# Altium PCB EE-10_Breakout.PcbDoc
Units mm, origin at the board's own origin, x right, y up, seen from the top; angles counter-clockwise.
Board outline 100.96 x 21.72 mm, 4 copper layers (L1 (Top), L2 (Gnd), L3 (VDD_NRF), L4 (Bottom)), stack 0.778 mm thick; 14 components, 41 nets, 171 pads, 65 vias.
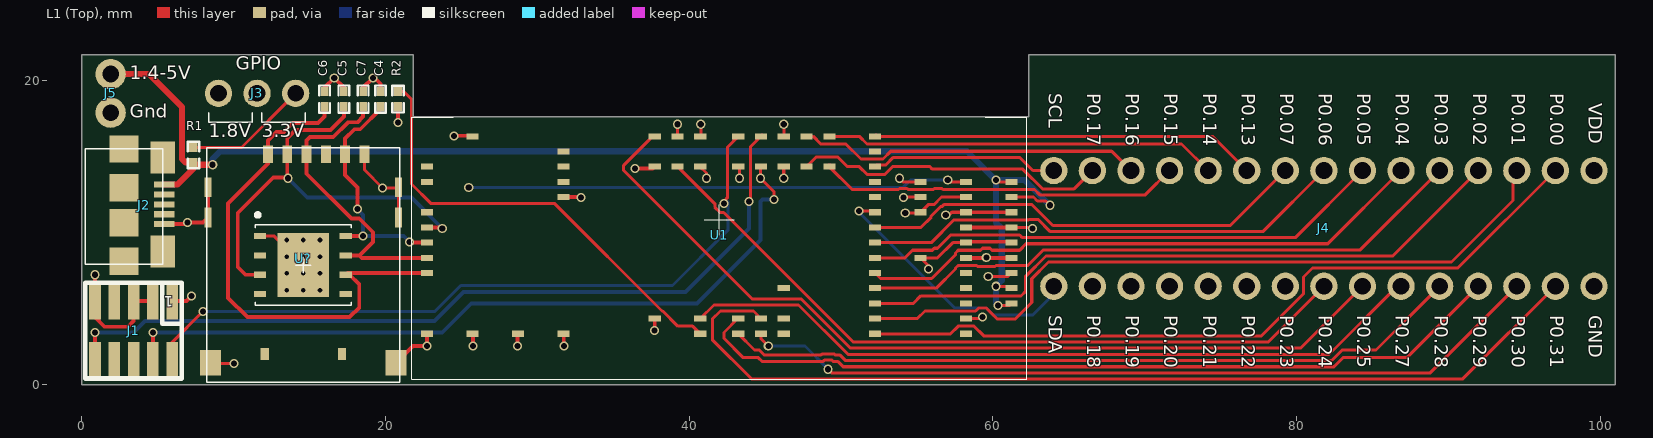
[diagram p0: L1 (Top) view]
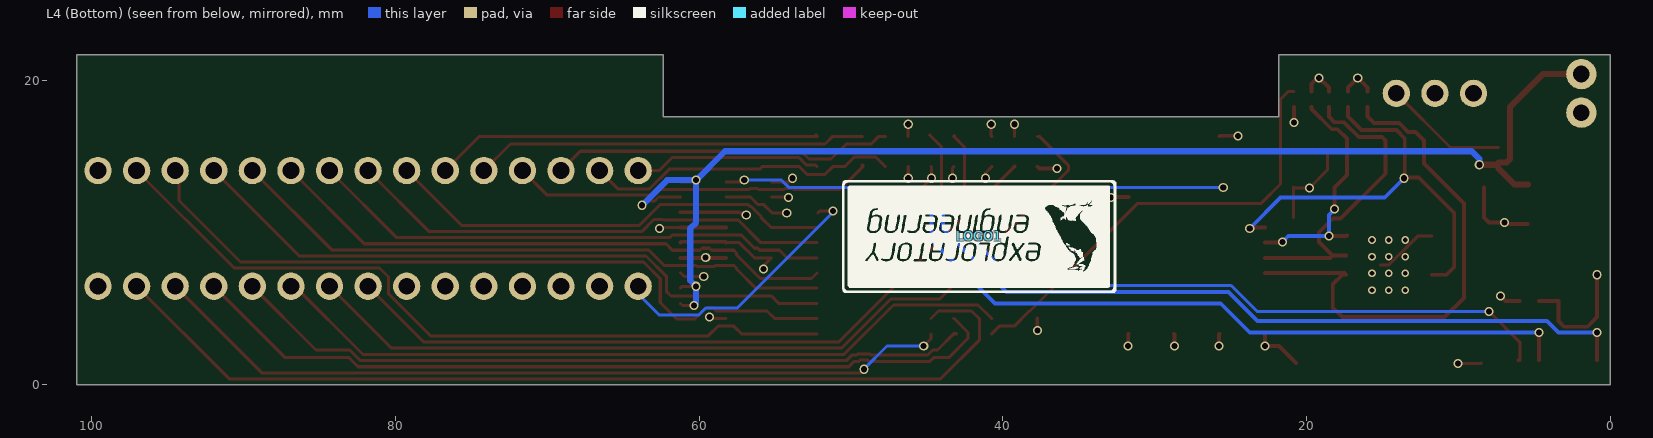
[diagram p1: L4 (Bottom) view, seen from below]
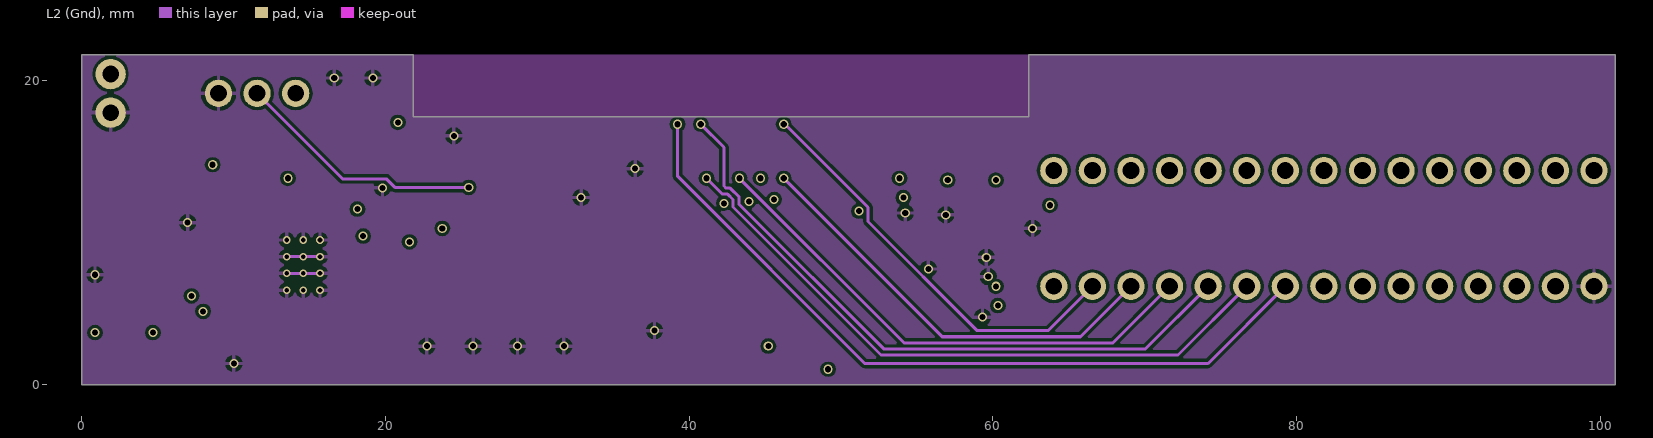
[diagram p2: L2 (Gnd)]
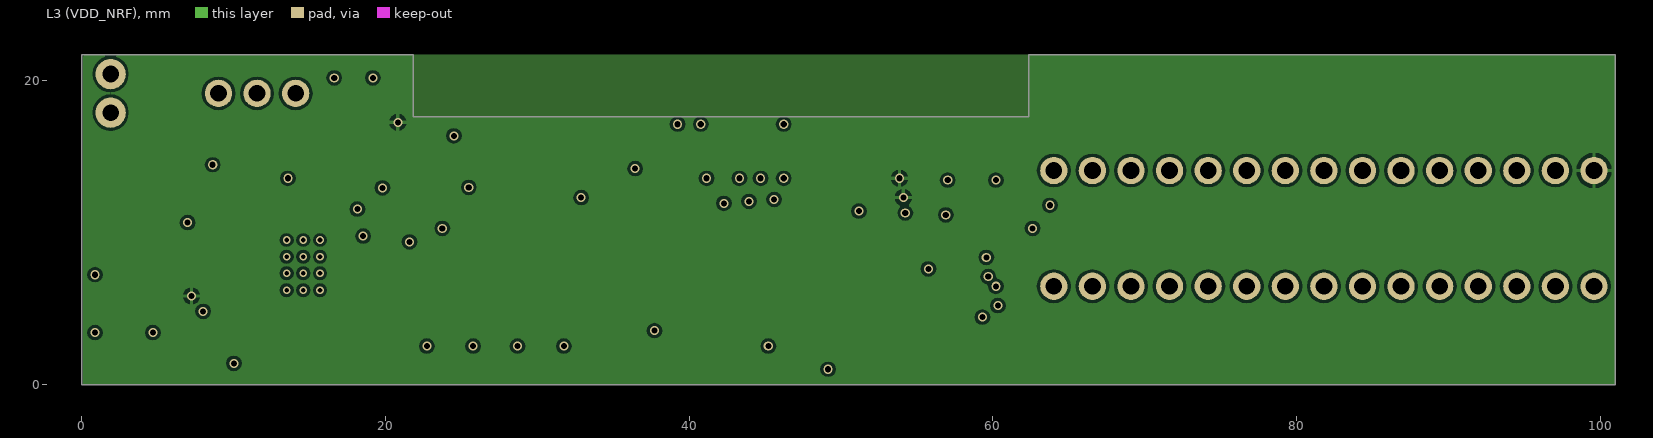
[diagram p3: L3 (VDD_NRF)]
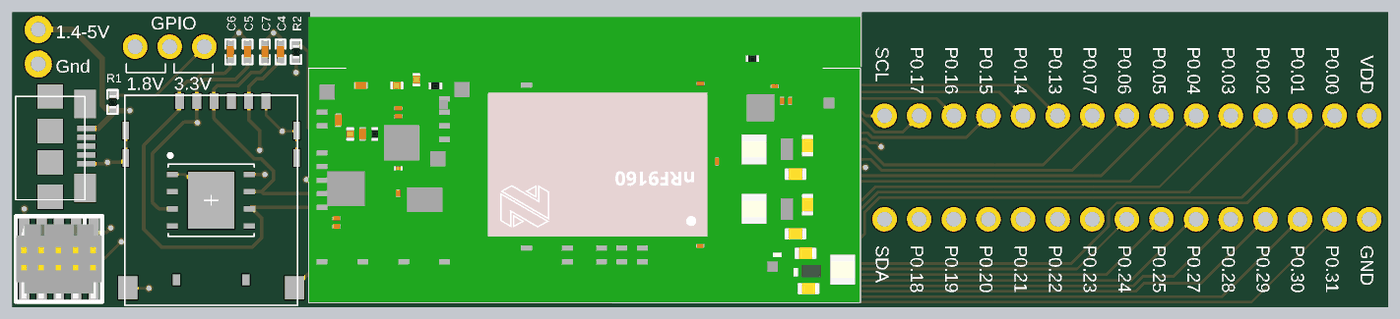
[diagram p4: 3D render of the assembled board from above, using the file's embedded part models]

## Layer stack, top to bottom
Top Solder: solder mask 0.0102, Solder Resist, Dk 3.5
L1 (Top): signal copper 0.0356
Dielectric 1: core 0.254, FR-4, Dk 4.2
L2 (Gnd): signal copper 0.036
Dielectric 3: prepreg 0.127, Dk 4.2
L3 (VDD_NRF): signal copper 0.036
Dielectric 2: core 0.254, Dk 4.2
L4 (Bottom): signal copper 0.0356
Bottom Solder: solder mask 0.0102, Solder Resist, Dk 3.5

## Board outline
21.844,21.717 21.844,17.653 62.357,17.653 62.357,21.717 100.965,21.717 100.965,0 0,0 0,21.717

## Design rules (kind name [scope] priority, off if disabled: settings)
Clearance [All] p1: gap=0.2 ignorepadtopadclearanceinfootprint=FALSE
ComponentClearance [InComponent('LOGO1')] p1: gap=0 collisioncheckmode=3 verticalgap=0 showdistances=FALSE
ComponentClearance ComponentClearance_1 [All] p2: gap=0.254 collisioncheckmode=3 verticalgap=0.254 showdistances=FALSE
HoleToHoleClearance [All] p1: gap=0.2 allowstackedmicrovias=TRUE
MinimumSolderMaskSliver [All] p1: minsoldermaskwidth=0.1
PolygonConnect [All] p1: connectstyle=Relief reliefconductorwidth=0.254 reliefentries=4 polygonreliefangle="90 Angle" airgapwidth=0.254
RoutingVias [All] p1: holewidth=0.711 width=1.27 viastyle="Through Hole" minholewidth=0.711 minwidth=1.27 maxholewidth=0.711 maxwidth=1.27
SilkToSilkClearance [All] p1: silktosilkclearance=0.1
SilkToSolderMaskClearance [IsPad] p1: minsilkscreentomaskgap=0 clearancetoexposedcopper=TRUE
SolderMaskExpansion [All] p1: expansion=0.102
Width [All] p1: maxlimit=3 minlimit=0.1 preferedwidth=0.2
25 further rules are at their usual default settings.

## Components (designator, comment, footprint, x,y, rotation, side; value= is the part's Value field where it differs from the comment)
C4 "100nF" CAPC1005X04L 19.685,18.796 r270 top
C5 "47pF" CAPC1005X04L 17.272,18.796 r90 top
C6 "47pF" CAPC1005X04L 16.002,18.796 r90 top
C7 "47pF" CAPC1005X04L 18.542,18.796 r90 top
J1 "FTSH-105-01-F-DV-K-P" FTSH-105-K 3.429,3.556 r180 top
J2 "USB" USB_10118192-0001LF 2.794,15.518 r270 top
J3 "VOLTAGE_SELECTOR" JUMPER_SELECTOR 14.097,19.177 r270 top
J4 "EE-10_Breakout" nRF91_BREAKOUT 97.028,14.097 r270 top
J5 "1.4-5V" BATTERY_SOLDER_CONNECTOR 1.915,20.447 r270 top
LOGO1 "EE LOGO" EE_LOGO 41.529,9.779 r0 bottom
R1 "10k" RESC1005X04L 7.366,15.113 r270 top
R2 "10k" RESC1005X04L 20.828,18.796 r270 top
U1 "EE-10-v0.3" EE-10_V0.3 41.983,10.851 r180 top
U? "SkySIM Argo 512 M2M SMD" DUAL_SIM_FOOTPRINT 14.599,7.874 r270 top

## Footprints (in the part's own frame and the unit in brackets; to place one, negate y for a bottom-side part, rotate by r counter-clockwise, add the part's x,y. Pads: shape width x height; smd on the part's side, far side on the other; paste and mask are expansions set on the pad)
BATTERY_SOLDER_CONNECTOR [mm]
  round 2 hole 1.1: 1(0,0) 2(2.54,0)
CAPC1005X04L [mm]
  rect 0.6x0.5 smd: 1(-0.5,0) 2(0.5,0)
  silkscreen extent -0.9,-0.35 0.9,0.35, body extent -0.51,-0.25 0.51,0.25, height 0.5
DUAL_SIM_FOOTPRINT [mm] "Dual SIM footprint - MFF2 and MicroSIM"
  rect 1.15x0.65 smd: C1(-7.295,2.755) C2(-7.295,0.215) C3(-7.295,-2.325) C5(-7.295,4.025) C6(-7.295,1.485) C7(-7.295,-1.055)
  rect 0.4x0.8 smd mask+0.05: C1(-1.905,2.8) C2(-0.635,2.8) C3(0.635,2.8) C5(-1.905,-2.85) C7(0.635,-2.85) NC(-0.635,-2.85) NC(1.905,2.8) NC(1.905,-2.85)
  rect 1.3x0.45 smd: GND(-5.125,6.27) GND(-5.125,-6.27) GND(-3.125,6.27) GND(-3.125,-6.27)
  rect 4.2x3.4 smd: GND(0,0)
  rect 1.7x1.4 smd: GND(6.435,6.11) GND(6.435,-6.11)
  rect 0.8x0.54 smd: X1(5.855,2.54) X2(5.855,-2.54)
  silkscreen extent -7.73,-6.35 7.73,6.35, body extent -2.5,-3 2.5,3, height 0.9
EE-10_V0.3 [mm] "EE-10 v0.3 Footprint"
  rect 0.8x0.4 smd mask+0.05: 1(-19.25,5.5) 2(-19.25,4.5) 3(-19.25,3.5) 4(-19.25,2.5) 5(-19.25,1.5) 6(-19.25,0.5) 7(-19.25,-0.5) 8(-19.25,-1.5) 9(-19.25,-2.5) 10(-16.25,7.5) 11(-16.25,6.5) 12(-16.25,5.5) 13(-16.25,4.5) 14(-16.25,3.5) 15(-16.25,2.5) 16(-16.25,1.5) 17(-16.25,0.5) 18(-16.25,-0.5) 19(-16.25,-1.5) 20(-16.25,-2.5) 21(-13.25,2.5) 22(-13.25,-0.5) 23(-13.25,-1.5) 24(-13.25,-2.5) 25(-10.25,7.5) 26(-10.25,6.5) 27(-10.25,5.5) 28(-10.25,4.5) 29(-10.25,3.5) 30(-10.25,2.5) 31(-10.25,1.5) 32(-10.25,0.5) 33(-10.25,-0.5) 34(-10.25,-1.5) 35(-10.25,-2.5) 36(-10.25,-3.5) 37(-10.25,-4.5) 38(-10.25,-5.5) 39(-7.25,-3.5) 40(-7.25,-5.5) 41(-5.75,-3.5) 42(-5.75,-5.5) 43(-4.25,7.5) 44(-4.25,6.5) 45(-4.25,4.5) 46(-4.25,-3.5) 47(-4.25,-5.5) 48(-2.75,7.5) 49(-2.75,6.5) 50(-2.75,-3.5) 51(-2.75,-5.5) 52(-1.25,7.5) 53(-1.25,6.5) 54(-1.25,-3.5) 55(-1.25,-5.5) 56(1.25,7.5) 57(1.25,6.5) 58(1.25,-3.5) 59(1.25,-5.5) 60(2.75,-3.5) 61(2.75,-5.5) 62(4.25,6.5) 63(4.25,-3.5) 64(4.25,-5.5) 65(10.25,7.5) 66(10.25,-1.5) 67(10.25,-2.5) 68(10.25,-3.5) 69(10.25,-4.5) 70(13.25,7.5) 71(16.25,7.5) 72(16.25,-5.5) 73(19.25,7.5) 74(19.25,3.5) 75(19.25,2.5) 76(19.25,1.5) 77(19.25,0.5) 78(19.25,-0.5) 79(19.25,-2.5) 80(19.25,-3.5)
  silkscreen extent -20.25,-6.75 20.25,10.5, body extent -20.25,-10.5 20.25,10.5, height 1.2
EE_LOGO [mm] "Exploratory Engineering Logo"
  silkscreen extent -8.98,-3.65 9.05,3.74
FTSH-105-K [mm]
  rect 0.76x2.4 smd: 1(-2.54,-1.95) 2(-2.54,1.95) 3(-1.27,-1.95) 4(-1.27,1.95) 5(0,-1.95) 6(0,1.95) 7(1.27,-1.95) 8(1.27,1.95) 9(2.54,-1.95) 10(2.54,1.95)
  silkscreen extent -3.18,-3.15 3.18,3.15, body extent -3.14,-2.92 3.14,2.92, height 5.71
JUMPER_SELECTOR [mm]
  round 1.8 hole 1.1: 1(0,0) 2(0,-2.54) 3(0,-5.08)
  silkscreen extent 1.27,-5.71 1.91,0.64
nRF91_BREAKOUT [mm]
  round 1.8 hole 1.1: 1(0,0) 2(0,-2.54) 3(0,-5.08) 4(0,-7.62) 5(0,-10.16) 6(0,-12.7) 7(0,-15.24) 8(0,-17.78) 9(0,-20.32) 10(0,-22.86) 11(0,-25.4) 12(0,-27.94) 13(0,-30.48) 14(0,-33.02) 15(7.62,-33.02) 16(7.62,-30.48) 17(7.62,-27.94) 18(7.62,-25.4) 19(7.62,-22.86) 20(7.62,-20.32) 21(7.62,-17.78) 22(7.62,-15.24) 23(7.62,-12.7) 24(7.62,-10.16) 25(7.62,-7.62) 26(7.62,-5.08) 27(7.62,-2.54) 28(7.62,0) 29(0,2.54) 30(7.62,2.54)
RESC1005X04L [mm]
  rect 0.6x0.55 smd: 1(-0.5,0) 2(0.5,0)
  silkscreen extent -0.87,-0.38 0.88,0.38, body extent -0.5,-0.25 0.5,0.25, height 0.3
USB_10118192-0001LF [mm]
  rect 0.4x1.35 smd mask+0.05: 1(2.35,2.65) 2(3,2.65) 3(3.65,2.65) 4(4.3,2.65) 5(4.95,2.65)
  rect 1.8x1.9 smd mask+0.05: 6(0,0) 6(2.55,0) 6(4.85,0) 6(7.4,0)
  rect 2.1x1.6 smd mask+0.05: 6(0.55,2.55) 6(6.75,2.55)
  silkscreen extent 0,-2.54 7.6,2.54

## Part data
C4: library part GRM155R71C104KA88D, "CAP CER 100nF 16V X7R 0402", Manufacturer="Murata Electronics North America", Operating Temperature="-55°C ~ 125°C", Package / Case="0402 (1005 Metric)", Ratings=-, Supplier Part Number 1=490-3261-6-ND, Temperature Coefficient=X7R, Tolerance=±10%, Voltage - Rated=16V, Applications="General Purpose", Capacitance=100nF, Category=Capacitors, ComponentLink1Description=http://www.murata.com/~/media/webrenewal/support/library/catalog/products/capacitor/mlcc/c02e.pdf, ComponentLink1URL=http://www.murata.com/~/media/webrenewal/support/library/catalog/products/capacitor/mlcc/c02e.pdf, Features=-, Height - Seated (Max)=-, Lead Spacing=-, Lead Style=-, Manufacturer Part Number=GRM155R71C104KA88D, Mounting Type="Surface Mount, MLCC", Packaging=Digi-Reel®, Pricing 1="1=0.16, 10=0.023, 50=0.0126, 100=0.0107, 250=0.00872, 500=0.00746, 1000=0.00581, 5000=0.00485 (EUR)", RoHS="RoHS Compliant", Size / Dimension="0.039\" L x 0.020\" W (1.00mm x 0.50mm)", Stock 1=24649903, Supplier 1=Digi-Key, Thickness (Max)="0.022\" (0.55mm)"
C5 C6 C7: library part GRM1555C1H470FA01D, "Multilayer Ceramic Capacitors MLCC - SMD/SMT 0402 47pF 50volts C0G 1%"
J1: "CONN HEADER 10POS DUAL .05\" SMD", Color=Black, Manufacturer="Samtec Inc.", Supplier Part Number 1=SAM8797-ND, Category="Connectors, Interconnects", ComponentLink1Description=http://suddendocs.samtec.com/prints/ftsh-1xx-xx-xxx-dv-xxx-mkt.pdf, ComponentLink1URL=http://suddendocs.samtec.com/prints/ftsh-1xx-xx-xxx-dv-xxx-mkt.pdf, Connector Type="Header, Shrouded", Contact Finish=Gold, Contact Finish Thickness="3µin (0.08µm)", Contact Mating Length="0.120\" (3.05mm)", Contact Type="Male Pin", Fastening Type=-, Features=-, Manufacturer Part Number=FTSH-105-01-F-DV-K-P, Mounting Type="Surface Mount", Number of Positions=10, Number of Positions Loaded=All, Number of Rows=2, Packaging=Tube, Pitch="0.050\" (1.27mm)", Pricing 1="1=3.48, 10=2.948, 50=2.546, 100=2.278, 250=2.01, 500=1.876, 1000=1.742, 2500=1.675, 5000=1.6415 (USD)", RoHS="RoHS Compliant", Row Spacing="0.050\" (1.27mm)", Stock 1=160, Supplier 1=Digi-Key, Termination=Solder
J2: library part 10118192-0001LF, "USB - micro B USB 2.0 Receptacle Connector 5 Position Surface Mount, Right Angle, Horizontal"
J5: library part BATTERY_CONNECTOR
LOGO1: library part EE-LOGO, "Exploratory Engineering Logo Silkscreen"
R1 R2: library part RC0402FR-0710KL, "RES SMD 10K OHM 1% 1/16W 0402", Manufacturer=Yageo, Operating Temperature="-55°C ~ 155°C", Package / Case="0402 (1005 Metric)", Power (Watts)="0.063W, 1/16W", Supplier Device Package=0402, Supplier Part Number 1=311-10.0KLRDKR-ND, Temperature Coefficient=±100ppm/°C, Tolerance=±1%, Category=Resistors, ComponentLink1Description=http://www.yageo.com/NewPortal/yageodocoutput?fileName=/pdf/R-Chip/PYu-RC_Group_51_RoHS_L_3.pdf, ComponentLink1URL=http://www.yageo.com/NewPortal/yageodocoutput?fileName=/pdf/R-Chip/PYu-RC_Group_51_RoHS_L_3.pdf, Composition="Thick Film", Features="Moisture Resistant", Height="0.016\" (0.40mm)", Manufacturer Part Number=RC0402FR-0710KL, Number of Terminations=2, Packaging=Digi-Reel®, Pricing 1="1=0.1, 10=0.013, 25=0.0096, 100=0.0054, 250=0.00412, 500=0.00328, 1000=0.00242, 2500=0.0021, 5000=0.00173 (USD)", Resistance (Ohms)=10k, RoHS="RoHS Compliant", Size / Dimension="0.039\" L x 0.020\" W (1.00mm x 0.50mm)", Stock 1=3763255, Supplier 1=Digi-Key
U1: "EE-10 v0.3 PCB Module", Manufacturer=Telenor, Manufacturer Part Number=EE-10-v0.3
U?: library part SKYSIM-ARGO-LTE-MFF2_1, "SkySIM® Argo 512 M2M SMD - LTE"

## Via types
v1: diameter 0.6, hole 0.4, L1 (Top) to L4 (Bottom), tented both sides, 53 vias
v2: diameter 0.5, hole 0.3, L1 (Top) to L4 (Bottom), tented bottom, 12 vias

## Nets (pads, with @x,y where several pads share a name; then routed paths per layer and width w, separated by ;. In a path a pad name is that pad's centre, name@x,y a point inside that pad or via, vN(x,y) a via of type N, cw(c..) or ccw(c..) an arc to the next point about the centre after c; other vN are vias at no path point)
GND: C4.1 C5.2 C6.2 C7.2 J1.3 J1.5 J1.9 J2.5 J3.3 J4.30 J5.2 U1.3 U1.4 U1.5 U1.6 U1.7 U1.11 U1.15 U1.16 U1.17 U1.18 U1.19 U1.21 U1.22 U1.62 U1.63 U1.65 U1.66 U1.70 U1.71 U1.72 U1.73 U?.C5 U?.GND | length 70.7
  L1 (Top) w0.2: U?.GND@8.489,1.439 8.531,1.397 v1(10.033,1.397) ; U?.C5@11.749,9.779 12.694,9.779 14.599,7.874 U?.GND@15.149,7.874 ; U?.C5@18.624,15.169 18.624,14.142 v1(19.812,12.954) 20.824,12.954 20.869,12.999 U?.GND@20.869,10.999 ; v1(54.229,11.303) 55.185,11.303 U1.22 55.733,11.851 56.116,11.851 56.616,12.351 U1.19 ; v1(55.753,7.62) 55.753,7.831 U1.21 56.357,8.351 57.357,9.351 U1.16 ; v1(56.896,11.176) 57.118,11.176 57.293,11.351 U1.18 ; U1.11 59.215,4.351 v1(59.309,4.445) ; v1(59.69,7.112) 60.964,7.112 61.218,7.366 U1.3 ; U1.6 62.547,10.351 v1(62.611,10.287)
  L1 (Top) w0.254: v1(0.889,7.239) J1.9 0.889,4.445 1.524,3.81 3.048,3.81 3.429,4.191 J1.5 J1.3 ; J2.5 6.885,10.568 v1(6.985,10.668) 7.998,10.668 8.329,10.999 U?.GND@8.329,12.999 ; C6.2 16.002,19.558 v1(16.637,20.193) 17.272,19.558 C5.2 ; C7.2 18.542,19.558 v1(19.177,20.193) 19.304,20.193 19.685,19.812 C4.1 ; U?.GND@20.709,1.439 21.81,2.54 v1(22.733,2.54) U1.73 ; v1(24.511,16.383) 25.701,16.383 U1.72 ; U1.71 25.781,3.303 v1(25.781,2.54) ; v1(28.702,2.54) 28.702,3.32 U1.70 ; U1.65 31.75,3.334 v1(31.75,2.54) ; U1.66 32.861,12.351 v1(32.893,12.319) ; v1(36.449,14.224) 37.606,14.224 U1.63 ; v1(37.719,3.556) 37.733,3.57 U1.62 ; U1.15 U1.4 ; U1.16 58.291,9.409 61.175,9.409 U1.5 ; U1.17 U1.6 ; U1.18 U1.7
  L2 (Gnd) w0.2: v2(13.499,7.324) v2(14.599,7.324) v2(15.699,7.324) ; v2(13.499,8.424) v2(14.599,8.424) v2(15.699,8.424)
  other v1: 59.563,8.382
  other v2: 13.499,6.224 14.599,6.224 15.699,6.224 13.499,9.524 14.599,9.524 15.699,9.524
NetC4_2: C4.2 U1.76 U?.C1 | length 15.8
  L1 (Top) w0.254: U?.C1@17.354,9.824 17.399,9.779 v1(18.542,9.779) ; v1(18.161,11.557) 18.161,12.991 17.354,13.798 17.354,15.169 17.354,16.211 17.961,16.818 18.349,16.818 19.685,18.154 C4.2 ; v1(21.59,9.398) 21.637,9.351 U1.76
  L4 (Bottom) w0.254: v1(18.161,11.557) 18.542,11.176 v1(18.542,9.779) 21.209,9.779 v1(21.59,9.398)
NetC5_1: C5.1 U1.77 U?.C7 | length 29.6
  L1 (Top) w0.254: U?.C7@11.749,7.239 10.795,7.239 10.287,7.747 10.287,11.303 12.618,13.634 13.544,13.634 13.544,15.169 13.544,16.211 14.097,16.764 16.383,16.764 17.272,17.653 C5.1 ; U1.77 23.685,10.351 v1(23.749,10.287)
  L4 (Bottom) w0.254: v1(13.589,13.589) 14.859,12.319 21.717,12.319 v1(23.749,10.287)
NetC6_1: C6.1 U1.74 U?.C3 | length 34
  L1 (Top) w0.254: C6.1 16.002,17.653 15.567,17.218 13.909,17.218 13.328,16.637 12.827,16.637 12.274,16.084 12.274,15.169 12.274,14.56 9.652,11.938 9.652,5.715 10.922,4.445 17.653,4.445 18.288,5.08 18.288,6.604 17.653,7.239 17.399,7.239 17.511,7.351 U1.74
NetC7_1: C7.1 U1.75 U?.C2 | length 20.5
  L1 (Top) w0.254: U?.C2@17.399,8.509 18.288,8.509 ; C7.1 18.542,17.653 18.161,17.272 17.533,17.272 16.571,16.31 15.04,16.31 14.814,16.084 14.814,15.169 14.814,13.888 17.772,10.93 18.28,10.93 19.177,10.033 19.177,9.398 18.288,8.509 ; U1.75 18.446,8.351 18.288,8.509
NetJ1_2: J1.2 U1.55 | length 48
  L1 (Top) w0.2: J1.2 5.969,2.794 v1(8.001,4.826) ; v1(42.291,11.938) 42.291,12.089 42.533,12.331 42.533,15.651 U1.55 U1.55@43.18,16.404
  L1 (Top) w0.254: J1.2 J1.2@6.051,1.606
  L4 (Bottom) w0.2: v1(8.001,4.826) 23.272,4.826 24.969,6.523 38.908,6.523 42.545,10.16 42.545,12.065 42.418,11.938 v1(42.291,11.938)
NetJ1_4: J1.4 U1.50 | length 50.4
  L1 (Top) w0.2: U1.50 44.704,14.322 v1(44.704,13.589) 45.593,12.7 v1(45.593,12.192)
  L1 (Top) w0.254: J1.4 v1(4.699,3.429)
  L4 (Bottom) w0.254: v1(4.699,3.429) 23.749,3.429 25.654,5.334 40.513,5.334 44.704,9.525 44.704,12.065 44.831,12.192 v1(45.593,12.192)
NetJ1_10: J1.10 U1.51 | length 54.2
  L1 (Top) w0.2: v1(43.942,12.065) 44.033,12.156 44.033,15.651 U1.51 U1.51@44.831,16.449
  L1 (Top) w0.254: J1.10 v1(0.889,3.429)
  L4 (Bottom) w0.254: v1(0.889,3.429) 3.429,3.429 4.191,4.191 23.241,4.191 25.146,6.096 39.751,6.096 43.942,10.287 v1(43.942,12.065)
NetJ3_1: J3.1 R1.1 | length 8.2
  L1 (Top) w0.2: R1.1 10.533,15.613 J3.1
NetJ3_2: J3.2 U1.20 | length 49.5
  L1 (Top) w0.2: v1(57.023,13.462) 57.134,13.351 U1.20
  L2 (Gnd) w0.2: J3.2 17.18,13.554 20.061,13.554 20.626,12.989 v1(25.492,12.989)
  L4 (Bottom) w0.2: v1(25.492,12.989) 54.097,12.989 54.57,13.462 v1(57.023,13.462)
NetJ4_1: J4.1 U1.25 | length 50.4
  L1 (Top) w0.2: U1.25 57.209,3.351 57.709,3.851 58.757,3.851 59.395,3.213 77.681,3.213 80.448,5.98 80.448,7.088 81.037,7.677 90.608,7.677 J4.1
NetJ4_2: J4.2 U1.26 | length 48.8
  L1 (Top) w0.2: U1.26 55.024,4.351 55.524,4.851 58.866,4.851 59.06,5.045 59.558,5.045 60.285,4.318 61.468,4.318 62.554,5.404 62.554,6.974 63.657,8.077 90.188,8.077 94.234,12.123 94.234,13.843 J4.2
NetJ4_3: J4.3 U1.27 | length 43.9
  L1 (Top) w0.2: U1.27 54.754,5.351 55.254,5.851 61.757,5.851 61.766,5.842 61.849,5.842 62.154,6.147 62.154,7.14 63.491,8.477 86.328,8.477 J4.3
NetJ4_4: J4.4 U1.28 | length 40.5
  L1 (Top) w0.2: U1.28 56.262,6.351 57.533,7.622 57.533,7.675 57.709,7.851 58.927,7.851 58.996,7.782 60.13,7.782 60.199,7.851 62.3,7.851 63.326,8.877 84.188,8.877 J4.4
NetJ4_5: J4.5 U1.29 | length 37.9
  L1 (Top) w0.2: U1.29 52.599,6.985 55.967,6.985 57.533,8.551 57.533,8.675 57.709,8.851 59.183,8.851 59.314,8.982 59.812,8.982 59.943,8.851 61.757,8.851 62.183,9.277 82.048,9.277 J4.5
NetJ4_6: J4.6 U1.30 | length 34.6
  L1 (Top) w0.2: U1.30 54.209,8.351 54.709,8.851 56.008,8.851 56.139,8.982 56.353,8.982 57.222,9.851 61.757,9.851 61.931,9.677 79.908,9.677 J4.6
NetJ4_7: J4.7 U1.31 | length 32.2
  L1 (Top) w0.2: U1.31 55.943,9.351 57.443,10.851 62.326,10.851 62.362,10.887 62.969,10.887 63.779,10.077 77.768,10.077 J4.7
NetJ4_8: J4.8 U1.32 | length 29.7
  L1 (Top) w0.2: U1.32 55.257,10.351 55.933,11.027 55.933,11.102 56.55,11.719 56.637,11.719 56.769,11.851 62.571,11.851 63.945,10.477 75.628,10.477 J4.8
NetJ4_9: J4.9 U1.38 | length 25.5
  L1 (Top) w0.2: U1.38 74.454,16.351 J4.9
  L1 (Top) w0.254: U1.38 U1.38@52.306,16.424
NetJ4_10: J4.10 U1.40 | length 25.9
  L1 (Top) w0.2: U1.40 51.209,16.351 51.709,15.851 72.414,15.851 J4.10
NetJ4_11: J4.11 U1.39 | length 24
  L1 (Top) w0.2: U1.39 50.733,12.851 53.785,12.851 53.853,12.919 54.351,12.919 54.419,12.851 56.071,12.851 56.139,12.919 56.637,12.919 56.705,12.851 62.737,12.851 63.091,12.497 70.028,12.497 J4.11
  L1 (Top) w0.254: U1.39 U1.39@49.233,14.435
NetJ4_12: J4.12 U1.42 | length 22.7
  L1 (Top) w0.2: U1.42 48.165,16.351 48.665,15.851 50.316,15.851 51.308,14.859 51.701,14.859 51.709,14.851 52.757,14.851 53.273,15.367 67.818,15.367 J4.12
NetJ4_13: J4.13 U1.41 | length 20.9
  L1 (Top) w0.2: U1.41 48.368,14.986 49.784,14.986 50.419,14.351 51.209,14.351 51.709,13.851 52.889,13.851 53.389,14.351 55.85,14.351 56.012,14.189 61.965,14.189 63.257,12.897 65.348,12.897 J4.13
NetJ4_14: J4.14 U1.36 | length 12.4
  L1 (Top) w0.2: U1.36 52.333,14.451 52.923,14.451 53.439,14.967 61.753,14.967 62.623,14.097 J4.14
NetJ4_15: J4.15 U1.33 | length 17.9
  L1 (Top) w0.2: v1(51.181,11.43) 52.058,11.43 U1.33@52.185,11.303
  L4 (Bottom) w0.2: v1(51.181,11.43) 51.181,11.343 57.479,5.045 59.558,5.045 60.031,4.572 62.611,4.572 64.008,5.969 J4.15
NetJ4_16: J4.16 U1.47 | length 28.5
  L1 (Top) w0.2: v1(46.228,17.145) 46.233,17.14 U1.47
  L2 (Gnd) w0.2: v1(46.228,17.145) 46.315,17.145 51.781,11.679 51.781,10.743 58.968,3.556 63.627,3.556 J4.16
NetJ4_17: J4.17 U1.46 | length 29.3
  L1 (Top) w0.2: v1(46.228,13.589) 46.228,14.346 U1.46
  L2 (Gnd) w0.2: v1(46.228,13.589) 56.661,3.156 65.767,3.156 J4.17
NetJ4_18: J4.18 U1.54 | length 35.1
  L1 (Top) w0.2: U1.54 43.307,14.277 v1(43.307,13.589)
  L2 (Gnd) w0.2: v1(43.307,13.589) 54.14,2.756 67.907,2.756 J4.18
NetJ4_19: J4.19 U1.59 | length 43.8
  L1 (Top) w0.2: U1.59 40.767,16.385 v1(40.767,17.145)
  L2 (Gnd) w0.2: v1(40.767,17.145) 42.291,15.621 42.291,13.081 42.434,12.938 42.705,12.938 43.291,12.352 43.291,11.867 52.802,2.356 70.047,2.356 J4.19
NetJ4_20: J4.20 U1.58 | length 43.5
  L1 (Top) w0.2: U1.58 41.148,13.936 v1(41.148,13.589)
  L2 (Gnd) w0.2: v1(41.148,13.589) 42.199,12.538 42.54,12.538 42.891,12.187 42.891,11.702 52.637,1.956 72.187,1.956 J4.20
NetJ4_21: J4.21 U1.61 | length 51.4
  L1 (Top) w0.2: U1.61 39.243,16.361 v1(39.243,17.145)
  L2 (Gnd) w0.2: v1(39.243,17.145) 39.243,13.716 51.562,1.397 74.168,1.397 J4.21
NetJ4_22: J4.22 U1.60 | length 49
  L1 (Top) w0.2: U1.60 39.257,14.351 41.691,11.917 41.691,11.689 42.042,11.338 42.27,11.338 50.795,2.813 78.124,2.813 J4.22
  L1 (Top) w0.254: U1.60 U1.60@39.243,14.361
NetJ4_23: J4.23 U1.64 | length 58.3
  L1 (Top) w0.2: U1.64 37.6,16.351 35.687,14.438 35.687,14.097 44.133,5.651 47.366,5.651 50.604,2.413 80.264,2.413 J4.23
NetJ4_24: J4.24 U1.57 | length 49.7
  L1 (Top) w0.2: U1.57 41.633,5.251 47.2,5.251 50.47,1.981 82.118,1.981 86.614,6.477 J4.24
NetJ4_25: J4.25 U1.52 | length 49.1
  L1 (Top) w0.2: U1.52 44.298,2.286 44.617,2.286 44.963,1.94 48.659,1.94 48.735,2.016 49.563,2.016 49.639,1.94 49.945,1.94 50.304,1.581 82.284,1.581 82.989,2.286 85.217,2.286 J4.25
  L1 (Top) w0.254: U1.52@43.094,3.351 U1.52
NetJ4_26: J4.26 U1.53 | length 54.4
  L1 (Top) w0.2: U1.53 43.209,4.351 42.291,3.433 42.291,3.048 43.561,1.778 44.56,1.778 44.798,1.54 48.824,1.54 48.9,1.616 49.398,1.616 49.474,1.54 49.78,1.54 50.139,1.181 82.449,1.181 83.046,1.778 87.249,1.778 J4.26
NetJ4_27: J4.27 U1.48 | length 53.4
  L1 (Top) w0.2: U1.48 44.733,3.019 v1(45.212,2.54) ; v1(49.149,1.016) 49.384,0.781 88.792,0.781 J4.27
  L4 (Bottom) w0.2: v1(45.212,2.54) 47.625,2.54 v1(49.149,1.016)
NetJ4_28: J4.28 U1.49 | length 64.1
  L1 (Top) w0.2: U1.49 44.233,4.851 42.062,4.851 41.529,4.318 41.529,2.952 44.1,0.381 90.932,0.381 J4.28
NetR2_1: R2.1 U1.56 | length 29.8
  L1 (Top) w0.2: R2.1 21.217,19.296 21.717,18.796 21.717,13.208 22.987,11.938 31.122,11.938 38.209,4.851 38.257,4.851 39.257,3.851 40.233,3.851 U1.56
VDD: J2.1 J5.1 R1.2 U1.1 U1.2 U1.8 U1.9 | length 85.6
  L1 (Top) w0.2: R1.2 R1.2@7.501,14.478 ; v1(60.198,6.477) 61.107,6.477 U1.2 ; v1(60.198,13.462) 60.309,13.351 U1.9 ; v1(60.325,5.207) 61.089,5.207 U1.1 ; U1.8 62.672,12.351 62.926,12.097 63.468,12.097 v1(63.754,11.811)
  L1 (Top) w0.254: 7.366,14.224 R1.2
  L1 (Top) w0.4: J5.1 4.445,20.447 6.604,18.288 6.604,14.859 6.85,14.613 R1.2 ; J2.1 6.31,13.168 7.366,14.224 ; R1.2@7.501,14.478 v1(8.636,14.478)
  L4 (Bottom) w0.2: v1@60.198,5.334 v1(60.325,5.207)
  L4 (Bottom) w0.4: v1(8.636,14.478) 8.636,14.859 9.144,15.367 58.293,15.367 v1(60.198,13.462) ; v1@60.198,5.334 v1(60.198,6.477) 60.579,6.858 60.579,10.287 60.198,10.668 v1(60.198,13.462) ; v1(63.754,11.811) 62.103,13.462 v1(60.198,13.462)
VDD_nRF91_GPIO: J1.1 J4.29 R2.2 U1.23 U1.24 | length 5.1
  L1 (Top) w0.2: v1(53.848,13.589) 54.086,13.351 U1.24 ; v1(54.102,12.319) 54.134,12.351 U1.23
  L1 (Top) w0.254: J1.1 6.903,5.506 v1(7.239,5.842) ; v1(20.828,17.272) R2.2
pads on no net: J1.6 J1.7 J1.8 J2.2 J2.3 J2.4 J2.6 U1.10 U1.12 U1.13 U1.14 U1.34 U1.35 U1.37 U1.43 U1.44 U1.45 U1.67 U1.68 U1.69 U1.78 U1.79 U1.80 U?.C6 U?.NC U?.X1 U?.X2

## Polygon pours and split planes (outlines as drawn)
no net on L4 (Bottom) "L4 (Bottom)-No Net" (solid, pour order 0): 0,0
GND on L2 (Gnd) "L2 (Gnd)-GND" (solid, pour order 4): 0,0 0,21.717 100.965,21.717 100.965,0
VDD_nRF91_GPIO on L3 (VDD_NRF) "L3 (VDD_NRF)-VDD_nRF91_GPIO" (solid, pour order 6): 0.127,0 0.127,21.59 0,21.717 100.965,21.717 100.965,0

## Other copper
L1 (Top):
  pour cut-out: 21.844,21.717 21.844,17.653 62.357,17.653 62.357,21.717

## Silkscreen, mask and mechanical layers (free items; w line width, h text height)
Mechanical 1:
  lines w0.1: -0.05,0 ccw(c0,0) 0,-0.05 ; -0.05,0 ccw(c0,0) 0,-0.05 ; -0.05,0 -0.05,21.717 ; -0.05,21.717 cw(c0,21.717) 0,21.767 ; -0.05,21.717 cw(c0,21.717) 0,21.767 ; 0,-0.05 100.965,-0.05 ; 0,21.767 21.844,21.767 ; 21.844,21.767 cw(c21.844,21.717) 21.894,21.717 ; 21.844,21.767 cw(c21.844,21.717) 21.894,21.717 ; 21.894,21.717 21.894,17.703 62.307,17.703 62.307,21.717 ; 62.307,21.717 cw(c62.357,21.717) 62.357,21.767 ; 62.307,21.717 cw(c62.357,21.717) 62.357,21.767 ; 62.357,21.767 100.965,21.767 ; 100.965,-0.05 ccw(c100.965,0) 101.015,0 ; 100.965,-0.05 ccw(c100.965,0) 101.015,0 ; 100.965,21.767 cw(c100.965,21.717) 101.015,21.717 ; 100.965,21.767 cw(c100.965,21.717) 101.015,21.717 ; 101.015,0 101.015,21.717
Mechanical 13:
  pour cut-out: 21.717,21.717 21.717,17.653 62.23,17.653 62.357,17.526 62.357,21.717

## Text inside footprints (layer, text, board x,y; h text height)
J1: Mechanical 17 "1" at 6.054,5.831 h0.69 r180; Top Overlay "1" at 6.054,5.831 h0.69 r180
J3: Top Overlay "GPIO" at 10.16,20.447 h1.52; Top Overlay "3.3V" at 11.874,16.002 h1.52; Top Overlay "1.8V" at 8.382,16.002 h1.52
J4: Top Overlay "P0.00" at 96.393,19.177 h1.52 r270; Top Overlay "P0.01" at 93.853,19.177 h1.52 r270; Top Overlay "P0.02" at 91.313,19.177 h1.52 r270; Top Overlay "P0.03" at 88.773,19.177 h1.52 r270; Top Overlay "P0.04" at 86.233,19.177 h1.52 r270; Top Overlay "P0.05" at 83.693,19.177 h1.52 r270; Top Overlay "P0.06" at 81.153,19.177 h1.52 r270; Top Overlay "P0.07" at 78.613,19.177 h1.52 r270; Top Overlay "P0.13" at 76.073,19.177 h1.52 r270; Top Overlay "P0.14" at 73.533,19.177 h1.52 r270; Top Overlay "P0.15" at 70.993,19.177 h1.52 r270; Top Overlay "P0.16" at 68.453,19.177 h1.52 r270; Top Overlay "P0.17" at 65.913,19.177 h1.52 r270; Top Overlay "SCL" at 63.373,19.177 h1.52 r270; Top Overlay "P0.31" at 96.393,4.572 h1.52 r270; Top Overlay "P0.30" at 93.853,4.572 h1.52 r270; Top Overlay "P0.29" at 91.313,4.572 h1.52 r270; Top Overlay "P0.28" at 88.773,4.572 h1.52 r270; Top Overlay "P0.27" at 86.233,4.572 h1.52 r270; Top Overlay "P0.25" at 83.693,4.572 h1.52 r270; Top Overlay "P0.24" at 81.153,4.572 h1.52 r270; Top Overlay "P0.23" at 78.613,4.572 h1.52 r270; Top Overlay "P0.22" at 76.073,4.572 h1.52 r270; Top Overlay "P0.21" at 73.533,4.572 h1.52 r270; Top Overlay "P0.20" at 70.993,4.572 h1.52 r270; Top Overlay "P0.19" at 68.453,4.572 h1.52 r270; Top Overlay "P0.18" at 65.913,4.572 h1.52 r270; Top Overlay "SDA" at 63.373,4.572 h1.52 r270; Top Overlay "VDD" at 98.933,18.542 h1.52 r270; Top Overlay "GND" at 98.933,4.572 h1.52 r270
J5: Top Overlay "Gnd" at 3.185,17.272 h1.52
U1: Mechanical 19 "No PCB in this area" at 57.483,20.751 h4 r180